# Altium PCB SkayboardRev4.PcbDoc (part 1 of 2)
Units mil, origin at the board's own origin, x right, y up, seen from the top; angles counter-clockwise.
Board outline 13972.57 x 4222.54 mil, 2 copper layers (Top Layer, Bottom Layer); 143 components, 152 nets, 1430 pads, 166 vias.
Unrouted connection lines stored in the file: 1.
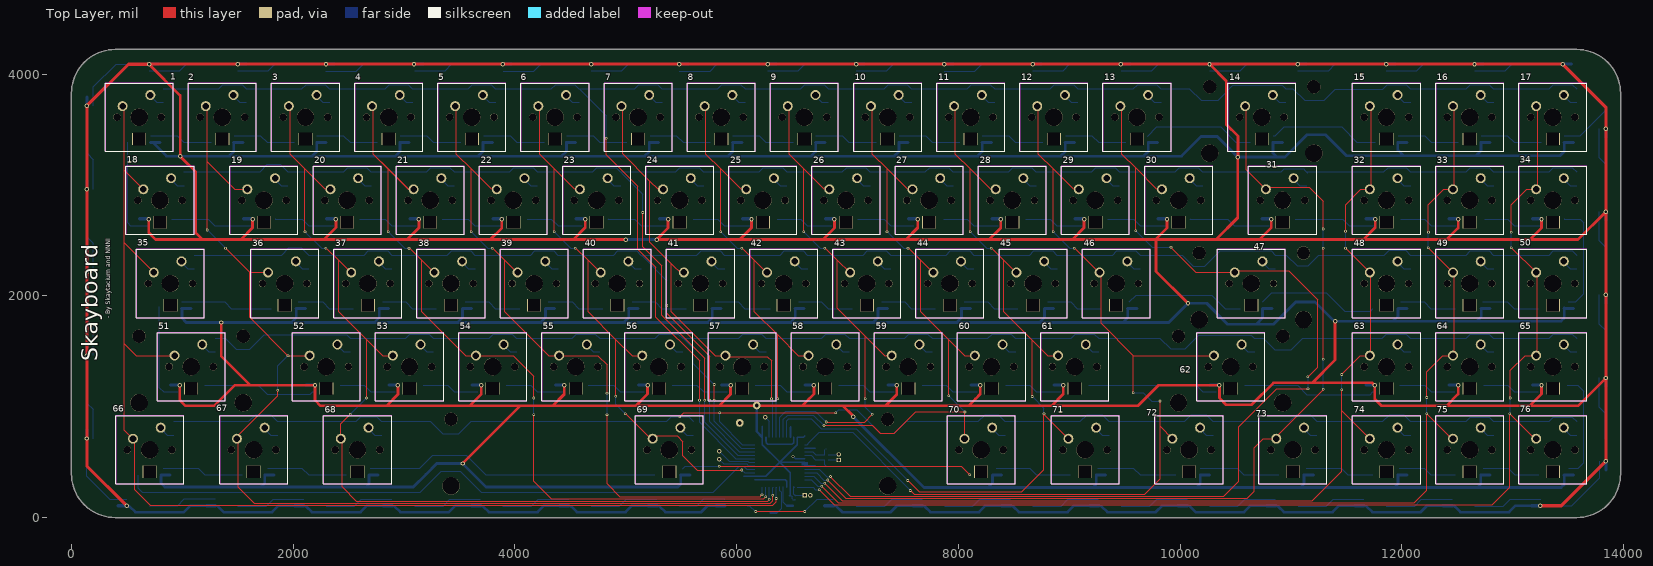
[diagram p0: Top Layer view]
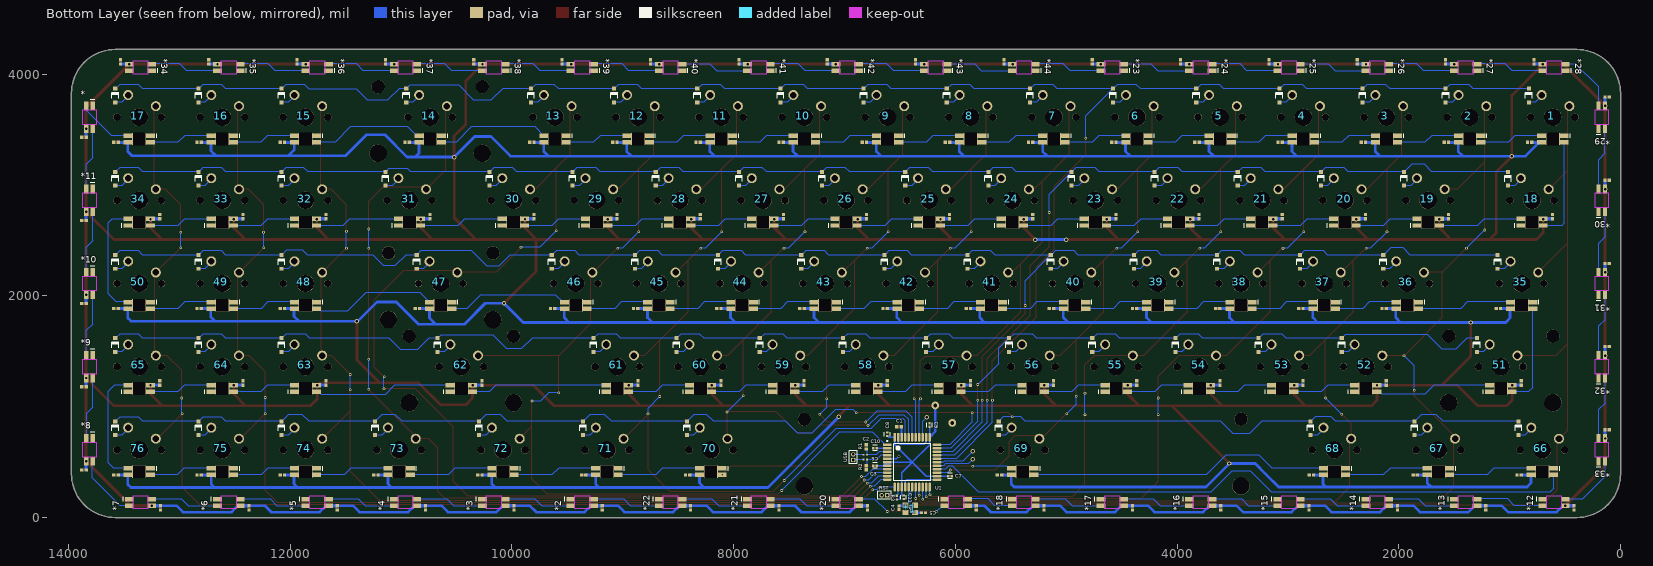
[diagram p1: Bottom Layer view, seen from below]

## Layer stack, top to bottom
Top Solder: solder mask 0.4, Solder Resist, Dk 3.5
Top Layer: signal copper 1.4
Dielectric 1: dielectric 12.6, FR-4, Dk 4.8
Bottom Layer: signal copper 1.4
Bottom Solder: solder mask 0.4, Solder Resist, Dk 3.5

## Board outline
58.09,188.06 42.95,215.02 30.04,243.12 19.35,272.1 10.94,301.83 4.92,332.15 1.29,362.86 0.04,393.78 0.09,3828.78 1.29,3859.71 4.92,3890.42 10.94,3920.74 19.35,3950.47 30.04,3979.52 42.95,4007.55 58.09,4034.52 75.23,4060.23 94.38,4084.52 115.38,4107.2 138.06,4128.22 162.37,4147.36 188.08,4164.52 215.04,4179.64 243.09,4192.55 272.12,4203.26 301.85,4211.65 332.18,4217.67 362.89,4221.33 393.81,4222.55 13578.87,4222.51 13609.73,4221.33 13640.44,4217.67 13670.75,4211.65 13700.52,4203.26 13729.5,4192.55 13757.57,4179.64 13784.53,4164.52 13810.24,4147.36 13834.5,4128.22 13857.25,4107.2 13878.24,4084.52 13897.33,4060.23 13914.53,4034.52 13929.69,4007.55 13942.61,3979.52 13953.31,3950.47 13961.62,3920.74 13967.76,3890.42 13971.35,3859.71 13972.61,3828.78 13972.61,393.78 13971.35,362.86 13967.76,332.15 13961.62,301.83 13953.31,272.1 13942.61,243.12 13929.69,215.02 13914.53,188.06 13897.33,162.34 13878.24,138.09 13857.25,115.36 13834.5,94.36 13810.24,75.21 13784.53,58.06 13757.57,42.93 13729.5,30.02 13700.52,19.33 13670.75,10.92 13640.44,4.9 13609.73,1.26 13578.87,0.01 393.81,0.07 362.89,1.26 332.18,4.9 301.85,10.92 272.12,19.33 243.09,30.02 215.04,42.93 188.08,58.06 162.37,75.21 138.06,94.36 115.38,115.36 94.38,138.09 75.23,162.34

## Design rules (kind name [scope] priority, off if disabled: settings)
BoardOutlineClearance [All] p1: gap=10 ignorepadtopadclearanceinfootprint=FALSE except(-1: Arc-OutlineEdge; 0: Arc-SplitContinuation Track-SplitContinuation SMDPad-SplitContinuation THPad-SplitContinuation Via-SplitContinuation Fill-SplitContinuation Poly-SplitContinuation Region-SplitContinuation Text-SplitContinuation)
Clearance [All] p1: gap=10 ignorepadtopadclearanceinfootprint=FALSE except(0: Arc-Hole Track-Hole SMDPad-Hole THPad-Hole Via-Hole Fill-Hole Poly-Hole Region-Hole Text-Hole)
PolygonConnect [All] p1: connectstyle=Relief reliefconductorwidth=10 reliefentries=4 polygonreliefangle="90 Angle" airgapwidth=10
RoutingVias [All] p1: holewidth=28 width=50 viastyle="Through Hole" minholewidth=28 minwidth=50 maxholewidth=28 maxwidth=50
SolderMaskExpansion [All] p1: expansion=4 istentingtop=FALSE
Width [All] p1: maxlimit=100 minlimit=5 preferedwidth=7.5 minimp=50.000000 maximp=50.000000 favimp=50.000000
30 further rules are at their usual default settings.

## Components (designator, comment, footprint, x,y, rotation, side; value= is the part's Value field where it differs from the comment)
1 "Skey LM" "MX RGB LM"#1 611.29,3611.31 r0 top
2 "Skey LM" "MX RGB LM"#1 1361.31,3611.29 r0 top
3 "Skey LM" "MX RGB LM"#1 2111.31,3611.29 r0 top
4 "Skey LM" "MX RGB LM"#1 2861.31,3611.29 r0 top locked
5 "Skey LM" "MX RGB LM"#1 3611.31,3611.29 r0 top
6 "Skey LM" "MX RGB LM"#1 4361.25,3611.29 r0 top
7 "Skey LM" "MX RGB LM"#1 5111.29,3611.32 r0 top
8 "Skey LM" "MX RGB LM"#1 5861.33,3611.29 r0 top
9 "Skey LM" "MX RGB LM"#1 6611.33,3611.29 r0 top
10 "Skey LM" "MX RGB LM"#1 7361.33,3611.29 r0 top
11 "Skey LM" "MX RGB LM"#1 8111.33,3611.29 r0 top
12 "Skey LM" "MX RGB LM"#1 8861.33,3611.29 r0 top
13 "Skey LM" "MX RGB LM"#1 9611.33,3611.29 r0 top
14 "Skey LM" "MX RGB LM"#1 10736.33,3611.29 r0 top
15 "Skey LM" "MX RGB LM"#1 11861.33,3611.29 r0 top
16 "Skey LM" "MX RGB LM"#1 12611.3,3611.31 r0 top
17 "Skey LM" "MX RGB LM"#2 13361.33,3611.29 r0 top
18 "Skey" "MX RGB"#1 798.78,2861.26 r0 top
19 "Skey" "MX RGB"#1 1736.31,2861.29 r0 top
20 "Skey" "MX RGB"#1 2486.31,2861.29 r0 top
21 "Skey" "MX RGB"#1 3236.31,2861.29 r0 top
22 "Skey" "MX RGB"#1 3986.32,2861.29 r0 top
23 "Skey" "MX RGB"#1 4736.33,2861.29 r0 top
24 "Skey" "MX RGB"#1 5486.33,2861.29 r0 top
25 "Skey" "MX RGB"#1 6236.33,2861.29 r0 top
26 "Skey" "MX RGB"#1 6986.33,2861.29 r0 top
27 "Skey" "MX RGB"#1 7736.33,2861.29 r0 top
28 "Skey" "MX RGB"#1 8486.33,2861.29 r0 top
29 "Skey" "MX RGB"#1 9236.33,2861.29 r0 top
30 "Skey" "MX RGB"#1 9986.33,2861.29 r0 top
31 "Skey" "MX RGB"#1 10923.79,2861.27 r0 top
32 "Skey" "MX RGB"#1 11861.33,2861.29 r0 top
33 "Skey" "MX RGB"#1 12611.33,2861.29 r0 top
34 "Skey" "MX RGB"#1 13361.33,2861.28 r0 top
35 "Skey LM" "MX RGB LM"#1 892.53,2111.25 r0 top
36 "Skey LM" "MX RGB LM"#1 1923.79,2111.26 r0 top
37 "Skey LM" "MX RGB LM"#1 2673.79,2111.26 r0 top
38 "Skey LM" "MX RGB LM"#1 3423.79,2111.26 r0 top
39 "Skey LM" "MX RGB LM"#1 4173.79,2111.26 r0 top
40 "Skey LM" "MX RGB LM"#1 4923.79,2111.27 r0 top
41 "Skey LM" "MX RGB LM"#1 5673.79,2111.27 r0 top
42 "Skey LM" "MX RGB LM"#1 6423.79,2111.27 r0 top
43 "Skey LM" "MX RGB LM"#1 7173.79,2111.27 r0 top
44 "Skey LM" "MX RGB LM"#1 7923.79,2111.27 r0 top
45 "Skey LM" "MX RGB LM"#1 8673.79,2111.27 r0 top
46 "Skey LM" "MX RGB LM"#1 9423.79,2111.27 r0 top
47 "Skey LM" "MX RGB LM"#1 10642.53,2111.27 r0 top
48 "Skey LM" "MX RGB LM"#1 11861.33,2111.29 r0 top
49 "Skey LM" "MX RGB LM"#1 12611.33,2111.29 r0 top
50 "Skey LM" "MX RGB LM"#1 13361.33,2111.28 r0 top
51 "Skey" "MX RGB"#1 1080.03,1361.26 r0 top
52 "Skey" "MX RGB"#1 2298.79,1361.26 r0 top
53 "Skey" "MX RGB"#1 3048.79,1361.26 r0 top
54 "Skey" "MX RGB"#1 3798.79,1361.27 r0 top
55 "Skey" "MX RGB"#1 4548.79,1361.27 r0 top
56 "Skey" "MX RGB"#1 5298.79,1361.27 r0 top
57 "Skey" "MX RGB"#2 6048.79,1361.27 r0 top
58 "Skey" "MX RGB"#1 6798.79,1361.27 r0 top
59 "Skey" "MX RGB"#1 7548.79,1361.27 r0 top
60 "Skey" "MX RGB"#1 8298.79,1361.27 r0 top
61 "Skey" "MX RGB"#1 9048.79,1361.27 r0 top
62 "Skey" "MX RGB"#1 10455.05,1361.27 r0 top
63 "Skey" "MX RGB"#1 11861.33,1361.29 r0 top
64 "Skey" "MX RGB"#1 12611.33,1361.29 r0 top
65 "Skey" "MX RGB"#1 13361.33,1361.29 r0 top
66 "Skey LM" "MX RGB LM"#1 705.03,611.26 r0 top
67 "Skey LM" "MX RGB LM"#1 1642.54,611.26 r0 top
68 "Skey LM" "MX RGB LM"#1 2580.04,611.26 r0 top
69 "Skey LM" "MX RGB LM"#1 5392.53,611.27 r0 top
70 "Skey LM" "MX RGB LM"#1 8205.05,611.27 r0 top
71 "Skey LM" "MX RGB LM"#1 9142.53,611.27 r0 top
72 "Skey LM" "MX RGB LM"#1 10080.05,611.27 r0 top
73 "Skey LM" "MX RGB LM"#1 11017.53,611.27 r0 top
74 "Skey LM" "MX RGB LM"#1 11861.33,611.29 r0 top
75 "Skey LM" "MX RGB LM"#1 12611.33,611.29 r0 top
76 "Skey LM" "MX RGB LM"#1 13361.33,611.29 r0 top
* "SK6812 Mini-E" "SK6812 Mini-E"#1 13810,3611.28 r90 bottom
*1 "16Mhz" 16Mhz 6405.51,78.74 r0 top
*2 "SK6812 Mini-E" "SK6812 Mini-E"#1 9365.62,138 r0 bottom
*3 "SK6812 Mini-E" "SK6812 Mini-E"#1 10162.5,138 r0 bottom
*4 "SK6812 Mini-E" "SK6812 Mini-E"#1 10959.38,138 r0 bottom
*5 "SK6812 Mini-E" "SK6812 Mini-E"#1 11756.25,138 r0 bottom
*6 "SK6812 Mini-E" "SK6812 Mini-E"#1 12553.12,138 r0 bottom
*7 "SK6812 Mini-E" "SK6812 Mini-E"#1 13350,138 r0 bottom
*8 "SK6812 Mini-E" "SK6812 Mini-E"#1 13810,611.29 r90 bottom
*9 "SK6812 Mini-E" "SK6812 Mini-E"#1 13810,1361.29 r90 bottom
*10 "SK6812 Mini-E" "SK6812 Mini-E"#1 13810,2111.28 r90 bottom
*11 "SK6812 Mini-E" "SK6812 Mini-E"#1 13810,2861.28 r90 bottom
*12 "SK6812 Mini-E" "SK6812 Mini-E"#1 600,138 r0 bottom
*13 "SK6812 Mini-E" "SK6812 Mini-E"#1 1396.88,138 r0 bottom
*14 "SK6812 Mini-E" "SK6812 Mini-E"#1 2193.75,138 r0 bottom
*15 "SK6812 Mini-E" "SK6812 Mini-E"#1 2990.62,138 r0 bottom
*16 "SK6812 Mini-E" "SK6812 Mini-E"#1 3787.5,138 r0 bottom
*17 "SK6812 Mini-E" "SK6812 Mini-E"#1 4584.38,138 r0 bottom
*18 "SK6812 Mini-E" "SK6812 Mini-E"#1 5381.25,138 r0 bottom
*19 "SK6812 Mini-E" "SK6812 Mini-E"#1 5992.12,138 r0 bottom
*20 "SK6812 Mini-E" "SK6812 Mini-E"#1 6975,138 r0 bottom
*21 "SK6812 Mini-E" "SK6812 Mini-E"#1 7771.88,138 r0 bottom
*22 "SK6812 Mini-E" "SK6812 Mini-E"#1 8568.75,138 r0 bottom
*23 "SK6812 Mini-E" "SK6812 Mini-E"#1 4584.38,4060 r180 bottom
*24 "SK6812 Mini-E" "SK6812 Mini-E"#1 3787.5,4060 r180 bottom
*25 "SK6812 Mini-E" "SK6812 Mini-E"#2 2990.62,4060 r180 bottom
*26 "SK6812 Mini-E" "SK6812 Mini-E"#1 2193.75,4060 r180 bottom
*27 "SK6812 Mini-E" "SK6812 Mini-E"#1 1396.88,4060 r180 bottom
*28 "SK6812 Mini-E" "SK6812 Mini-E"#1 600,4060 r180 bottom
*29 "SK6812 Mini-E" "SK6812 Mini-E"#1 170,3611.31 r270 bottom
*30 "SK6812 Mini-E" "SK6812 Mini-E"#2 170,2861.26 r270 bottom
*31 "SK6812 Mini-E" "SK6812 Mini-E"#1 170,2111.25 r270 bottom
*32 "SK6812 Mini-E" "SK6812 Mini-E"#2 170,1361.26 r270 bottom
*33 "SK6812 Mini-E" "SK6812 Mini-E"#1 170,611.26 r270 bottom
*34 "SK6812 Mini-E" "SK6812 Mini-E"#1 13350,4060 r180 bottom
*35 "SK6812 Mini-E" "SK6812 Mini-E"#1 12553.12,4060 r180 bottom
*36 "SK6812 Mini-E" "SK6812 Mini-E"#1 11756.25,4060 r180 bottom
*37 "SK6812 Mini-E" "SK6812 Mini-E"#1 10959.38,4060 r180 bottom
*38 "SK6812 Mini-E" "SK6812 Mini-E"#1 10162.5,4060 r180 bottom
*39 "SK6812 Mini-E" "SK6812 Mini-E"#2 9365.62,4060 r180 bottom
*40 "SK6812 Mini-E" "SK6812 Mini-E"#1 8568.75,4060 r180 bottom
*41 "SK6812 Mini-E" "SK6812 Mini-E"#2 7771.88,4060 r180 bottom
*42 "SK6812 Mini-E" "SK6812 Mini-E"#1 6975,4060 r180 bottom
*43 "SK6812 Mini-E" "SK6812 Mini-E"#1 6178.12,4060 r180 bottom
*44 "SK6812 Mini-E" "SK6812 Mini-E"#1 5381.25,4060 r180 bottom
C1 "100nF" CAPC1050X55X23ML05T13 6507.87,818.9 r180 bottom
C2 "47pF" CAPC1005X55X30ML05T10 6803.15,637.8 r90 bottom
C3 "47pF" CAPC1005X55X30ML05T10 6803.15,449.61 r90 bottom
C4 "22pF" CAPC1005X56X25NL10T15 6509.25,88.88 r90 bottom
C5 "22pF" CAPC1005X56X25NL10T15 6287.4,43.31 r0 bottom
C6 "100nF" FP-C0402-BB-MFG 6724.41,468.5 r0 bottom value="0.10 μF"
C7 "100nF" FP-C0402-BB-MFG 6047.24,374.02 r180 bottom value="0.10 μF"
C8 "100nF" FP-C0402-BB-MFG 6614.17,751.97 r90 bottom value="0.10 μF"
C9 "100nF" FP-C0402-BB-MFG 6232.28,834.65 r90 bottom value="0.10 μF"
C10 "100nF" FP-C0402-BB-MFG 6724.41,625.98 r0 bottom value="0.10 μF"
C11 "100nF" FP-C0402-BB-MFG 6465.89,183.31 r270 bottom value="0.10 μF"
R1 "22R" RESC1005X40X25LL05T05 6811.02,566.93 r0 bottom
R2 "22R" RESC1005X40X25LL05T05 6811.02,523.62 r0 bottom
R3 "10K" RESC1005X40X25NL05T05 6527.56,181.1 r90 bottom
RST "MHDR1X2" MHDR1X2 6615.35,200.79 r0 bottom
U1 "ATmega32U4-AU" 44ML_M 6389.76,500 r180 bottom locked
USB "MHDR1X2" MHDR1X2 6921.26,519.68 r90 bottom
? "Comment" 2UStab 10736.33,3611.29 r0 top
? "Comment" 2UStab 10642.53,2111.27 r0 top
? "Comment" 2UStab 10455.05,1361.27 r0 top
? "Comment" 6.25UStab 5392.53,611.27 r0 top locked
? "Comment" 2UStab 1080.03,1361.26 r0 top

## Footprints (in the part's own frame and the unit in brackets; to place one, negate y for a bottom-side part, rotate by r counter-clockwise, add the part's x,y. Pads: shape width x height; smd on the part's side, far side on the other; paste and mask are expansions set on the pad)
2UStab [mil]
  round 157 hole 157: ""(-470,-325) ""(470,-325)
  round 120 hole 120: ""(-470,275) ""(470,275)
6.25UStab [mil]
  round 157 hole 157: ""(-1968.75,-325) ""(1968.75,-325)
  round 120 hole 120: ""(-1968.75,275) ""(1968.75,275)
16Mhz [mm]
  rect 1.4x1.2 smd far side: 1(-1.1,-0.85) 2(1.1,-0.85) 3(1.1,0.85) 4(-1.1,0.85)
44ML_M [mm] "Thin QFP, 44-Leads, Body 10x10mm, Pitch 0.8mm, IPC Low Density"
  oval 2.05x0.6 smd: 1(-5.7,4) 2(-5.7,3.2) 3(-5.7,2.4) 4(-5.7,1.6) 5(-5.7,0.8) 6(-5.7,0) 7(-5.7,-0.8) 8(-5.7,-1.6) 9(-5.7,-2.4) 10(-5.7,-3.2) 11(-5.7,-4) 23(5.7,-4) 24(5.7,-3.2) 25(5.7,-2.4) 26(5.7,-1.6) 27(5.7,-0.8) 28(5.7,0) 29(5.7,0.8) 30(5.7,1.6) 31(5.7,2.4) 32(5.7,3.2) 33(5.7,4)
  oval 0.6x2.05 smd: 12(-4,-5.7) 13(-3.2,-5.7) 14(-2.4,-5.7) 15(-1.6,-5.7) 16(-0.8,-5.7) 17(0,-5.7) 18(0.8,-5.7) 19(1.6,-5.7) 20(2.4,-5.7) 21(3.2,-5.7) 22(4,-5.7) 34(4,5.7) 35(3.2,5.7) 36(2.4,5.7) 37(1.6,5.7) 38(0.8,5.7) 39(0,5.7) 40(-0.8,5.7) 41(-1.6,5.7) 42(-2.4,5.7) 43(-3.2,5.7) 44(-4,5.7)
  silkscreen extent -5.82,-4.25 4.25,4.97, body extent -5,-5 5,5, height 1.2
CAPC1005X55X30ML05T10 [mm] "Chip Capacitor, 2-Leads, Body 1.00x0.50mm, IPC Low Density"
  rect 0.76x0.72 smd: 1(-0.48,0) 2(0.48,0)
  body extent -0.53,-0.28 0.53,0.27, height 0.55
CAPC1005X56X25NL10T15 [mm] "Chip Capacitor, 2-Leads, Body 1.00x0.50mm, IPC Medium Density"
  rect 0.68x0.64 smd: 1(-0.44,0) 2(0.44,0)
  body extent -0.55,-0.3 0.55,0.3, height 0.56
CAPC1050X55X23ML05T13 [mm] "Chip Capacitor, 2-Leads, Body 1.05x0.55mm, IPC Low Density"
  rect 0.76x0.72 smd: 1(-0.49,0) 2(0.49,0)
  body extent -0.53,-0.28 0.53,0.27, height 0.55
FP-C0402-BB-MFG [mm]
  rect 0.52x0.52 smd paste+0 mask+0: 1(-0.4,0) 2(0.4,0)
  silkscreen extent -0.5,-0.64 0.5,0.64, body extent -0.5,-0.25 0.5,0.25, height 0.55
MHDR1X2 [mm] "Connector; Header; 2 Position"
  rect 1x1 hole 0.6: 1(0,0)
  round 1 hole 0.6: 2(1.27,0)
  silkscreen extent -0.9,-0.9 2.17,0.9
"MX RGB"#1 [mm] "Skey's footprint"
  rect 2x1 smd far side: 1(-2.6,-4.25) 2(-2.6,-5.75) 3(2.6,-5.75) 4(2.6,-4.25)
  rect 0.72x0.76 smd far side: 3(-4.699,-3.248) ""(-4.699,-4.228)
  round 2.286 hole 1.499: 5(-3.81,2.54) ""(2.54,5.08)
  rect 0.95x0.9 smd far side: 6(5.488,6.534) ""(5.488,3.384)
  round 1.702 hole 1.702: ""(-5.08,0) ""(5.08,0)
  rect 3.2x2.8 hole 2.8 square: ""(0,-5)
  round 3.988 hole 3.988: ""(0,0)
  Top Layer keep-out region: -7.8,-7.8 7.8,-7.8 7.8,7.8 -7.8,7.8
  Bottom Layer lines w0.127: 2.529,4.846 3.991,3.384 5.507,3.384
  Bottom Layer lines w0.254: 2.521,4.829 2.521,5.132 ; 2.529,4.846 2.529,5.12
  Bottom Layer lines w0.737: -4.659,-4.227 -2.6,-4.227 -2.589,-4.227 -2.551,-4.227
  silkscreen extent -7.8,-7.8 7.8,7.8
"MX RGB"#2 [mm] "Skey's footprint"
  rect 2x1 smd far side: 1(-2.6,-4.25) 2(-2.6,-5.75) 3(2.6,-5.75) 4(2.6,-4.25)
  rect 0.72x0.76 smd far side: 3(-4.699,-3.248) ""(-4.699,-4.228)
  round 2.286 hole 1.499: 5(-3.81,2.54) ""(2.54,5.08)
  rect 0.95x0.9 smd far side: 6(5.488,6.534) ""(5.488,3.384)
  round 1.702 hole 1.702: ""(-5.08,0) ""(5.08,0)
  rect 3.2x2.8 hole 2.8 square: ""(0,-5)
  round 3.988 hole 3.988: ""(0,0)
  Top Layer keep-out region: -7.8,-7.8 7.8,-7.8 7.8,7.8 -7.8,7.8
  Bottom Layer lines w0.127: 2.529,4.846 3.991,3.384 5.507,3.384
  Bottom Layer lines w0.254: 2.521,4.829 2.521,5.132 ; 2.529,4.846 2.529,5.12
  Bottom Layer lines w0.737: -4.659,-4.227 -2.551,-4.227
  silkscreen extent -7.8,-7.8 7.8,7.8
"MX RGB LM"#1 [mm] "Skey's footprint"
  rect 2x1 smd far side: 1(-2.6,-4.25) 2(-2.6,-5.75) 3(2.6,-5.75) 4(2.6,-4.25)
  rect 0.76x0.72 smd far side: 1(5.805,-5.75) ""(4.825,-5.75)
  round 2.286 hole 1.499: 5(-3.81,2.54) ""(2.54,5.08)
  rect 0.95x0.9 smd far side: 6(5.488,6.534) ""(5.488,3.384)
  round 1.702 hole 1.702: ""(-5.08,0) ""(5.08,0)
  rect 3.2x2.8 hole 2.8 square: ""(0,-5)
  round 3.988 hole 3.988: ""(0,0)
  Top Layer keep-out region: -7.8,-7.8 7.8,-7.8 7.8,7.8 -7.8,7.8
  Bottom Layer lines w0.127: 2.529,4.846 3.991,3.384 5.507,3.384
  Bottom Layer lines w0.254: 2.521,4.829 2.521,5.132 ; 2.529,4.846 2.529,5.12
  Bottom Layer lines w0.7: 2.592,-5.754 4.7,-5.754
  silkscreen extent -7.8,-7.8 7.8,7.8
"MX RGB LM"#2 [mm] "Skey's footprint"
  rect 2x1 smd far side: 1(-2.6,-4.25) 2(-2.6,-5.75) 3(2.6,-5.75) 4(2.6,-4.25)
  rect 0.76x0.72 smd far side: 1(5.805,-5.75) ""(4.825,-5.75)
  round 2.286 hole 1.499: 5(-3.81,2.54) ""(2.54,5.08)
  rect 0.95x0.9 smd far side: 6(5.488,6.534) ""(5.488,3.384)
  round 1.702 hole 1.702: ""(-5.08,0) ""(5.08,0)
  rect 3.2x2.8 hole 2.8 square: ""(0,-5)
  round 3.988 hole 3.988: ""(0,0)
  Top Layer keep-out region: -7.8,-7.8 7.8,-7.8 7.8,7.8 -7.8,7.8
  Bottom Layer lines w0.127: 2.529,4.846 3.991,3.384 5.507,3.384
  Bottom Layer lines w0.254: 2.521,4.829 2.521,5.132 ; 2.529,4.846 2.529,5.12
  Bottom Layer lines w0.7: 2.592,-5.754 2.6,-5.754 2.622,-5.754 4.7,-5.754
  silkscreen extent -7.8,-7.8 7.8,7.8
RESC1005X40X25LL05T05 [mm] "Chip Resistor, 2-Leads, Body 1.00x0.50mm, IPC High Density"
  rect 0.45x0.45 smd: 1(-0.4,0) 2(0.4,0)
  body extent -0.53,-0.27 0.53,0.28, height 0.4
RESC1005X40X25NL05T05 [mm] "Chip Resistor, 2-Leads, Body 1.00x0.50mm, IPC Medium Density"
  rect 0.55x0.55 smd: 1(-0.45,0) 2(0.45,0)
  body extent -0.53,-0.27 0.53,0.28, height 0.4
"SK6812 Mini-E"#1 [mm]
  rect 2x1 smd: 1(-2.6,0.769) 2(-2.6,-0.731) 3(2.6,-0.731) 4(2.6,0.769)
  rect 0.72x0.76 smd: 3(-4.598,1.756) ""(-4.598,0.776)
  Top Layer lines w0.737: -4.558,0.777 -2.6,0.777 -2.449,0.777
  Top Layer keep-out region: -1.7,1.5 1.7,1.5 1.7,-1.5 -1.7,-1.5
  silkscreen extent 3.98,-1.23 3.98,-0.23
"SK6812 Mini-E"#2 [mm]
  rect 2x1 smd: 1(-2.6,0.769) 2(-2.6,-0.731) 3(2.6,-0.731) 4(2.6,0.769)
  rect 0.72x0.76 smd: 3(-4.598,1.756) ""(-4.598,0.776)
  Top Layer lines w0.737: -2.449,0.777 -2.525,0.777 -2.6,0.777 -4.558,0.777
  Top Layer keep-out region: -1.7,1.5 1.7,1.5 1.7,-1.5 -1.7,-1.5
  silkscreen extent 3.98,-1.23 3.98,-0.23

## Part data
1 2 3 4 5 6 7 8 9 10 11 12 13 14 15 16 17 35 36 37 38 39 40 41 42 43 44 45 46 47 48 49 50 66 67 68 69 70 71 72 73 74 75 76: "Skey but the LED is mirrored"
18 19 20 21 22 23 24 25 26 27 28 29 30 31 32 33 34 51 52 53 54 55 56 57 58 59 60 61 62 63 64 65: "Skaytacium's keyboard's key's symbol"
*1: "LCSC didn't have the footprint"
C1: library part CMP-2000-05439-1, "Chip Capacitor, 100 nF, +/- 10%, 16 V, -55 to 125 degC, 0402 (1005 Metric), RoHS, Tape and Reel", Capacitance=100000pF, Case Size/Dimension=0402, Dielectric=X7R, Manufacturer="Samsung Electro-Mechanics", Rated Voltage=16V, Tolerance (%)=±10%, Datasheet URL=https://datasheet.ciiva.com/29198/458718-da-01-en-vs-kondensator-0402-29198423.pdf, Datasheet Version=Nov-10, Manufacturer URL=http://www.samsungsem.com/global/index.jsp
C2 C3: library part CMP-2008-03283-1, Manufacturer=Kemet, Part Number=C0402C470J5GACTU
C4 C5: library part CMP-2008-02613-1, Manufacturer="AVX Interconnect / Elco", Part Number=04025A220JAT2A
C6 C7 C8 C9 C10 C11: library part CMP-03020-023811-1, "CAP CER 0.1UF 10V X5R 0402", Capacitance="0.10 μF", Manufacturer=Kemet, Manufacturer Part Number=C0402C104K8PACTU, Package=C0402-BB, Temperature="-55°C to +125°C", Temperature Characteristic=X5R, Temperature Coefficient=15%, Temperature Range High=+125°C, Temperature Range Low=-55°C, Tolerance=0.1, Voltage Rating="10 V", Automotive=No, Category=Cap, ComponentLink2Description=Datasheet, ComponentLink2URL=https://content.kemet.com/datasheets/KEM_C1002_X7R_SMD.pdf, Device Class L1="Passive Components", Device Class L2=Capacitors, Device Class L3="Ceramic Capacitors", Digikey Description="CAP CER 0.1UF 10V X5R 0402", Height=0.55mm, Ipc Land Pattern Name=CAPC10050X50, Lead Free=Yes, Material=Ceramic, Mouser Description="Capacitor 100 nF 10 VDC 0402", Octopart=https://octopart.com/c0402c104k8pactu-kemet-140039, RoHS=TRUE
R1 R2: library part CMP-2002-08382-1, Manufacturer="Vishay Dale", Part Number=CRCW040222R0FKED
R3: library part CMP-2002-01183-1, Manufacturer=Panasonic, Part Number=ERT-J0ER103J
RST USB: "Header, 2-Pin", LatestRevisionDate=17-Jul-2002, LatestRevisionNote="Re-released for DXP Platform.", Publisher="Altium Limited"
U1: library part CMP-0095-00285-2, "8-bit AVR Microcontroller, 2.7-5.5V, 16MHz, 32KB Flash, 1KB EEPROM, 2.5KB SRAM, USB Controller, 44-pin TQFP, Industrial Grade (-40°C to 85°C), Ext Osc", ComponentLink1Description="Manufacturer URL", ComponentLink1URL=http://www.atmel.com/, ComponentLink2Description="ATmega16U4/32U4 Datasheet", ComponentLink2URL=http://www.atmel.com/dyn/resources/prod_documents/doc7766.pdf, ComponentLink3Description="ATmega16U4 ATmega32U4 Summary", ComponentLink3URL=http://www.atmel.com/dyn/resources/prod_documents/7766S.pdf, DatasheetVersion="revF, Nov-2010", PackageDescription="44-Pin Plastic Thin Quad Flat Pack, 10 x 10 x 1.0 mm Body, 0.8 mm Pitch (TQFP)", PackageReference=44ML, PackageVersion="rev.G, Jul-2007", RevisionNote="DatasheetVersion updated. URLs added."

## Free pads (board coordinates)
  round 70 hole 35: ""(6027.56,854.33) ""(6181.1,1011.81)

## Via types
v1: diameter 24, hole 12, Top Layer to Bottom Layer, 92 vias
v2: diameter 40, hole 22, Top Layer to Bottom Layer, 73 vias
v3: diameter 30, hole 15, Top Layer to Bottom Layer, 1 vias

## Nets (pads, with @x,y where several pads share a name; then routed paths per layer and width w, separated by ;. In a path a pad name is that pad's centre, name@x,y a point inside that pad or via, vN(x,y) a via of type N, cw(c..) or ccw(c..) an arc to the next point about the centre after c; other vN are vias at no path point)
GND: 1.1 2.1 3.1 4.1 5.1 6.1 7.1 8.1 9.1 10.1 11.1 12.1 13.1 14.1 15.1 16.1 17.1 18.3 19.3 20.3 21.3 22.3 23.3 24.3 25.3 26.3 27.3 28.3 29.3 30.3 31.3 32.3 33.3 34.3 35.1 36.1 37.1 38.1 39.1 40.1 41.1 42.1 43.1 44.1 45.1 46.1 47.1 48.1 49.1 50.1 51.3 52.3 53.3 54.3 55.3 56.3 57.3 58.3 59.3 60.3 61.3 62.3 63.3 64.3 65.3 66.1 67.1 68.1 69.1 70.1 71.1 72.1 73.1 74.1 75.1 76.1 *2.3 *3.3 *4.3 *5.3 *6.3 *7.3 *8.3 *9.3 *10.3 *11.3 *12.3 *13.3 *14.3 *15.3 *16.3 *17.3 *18.3 *19.3 *20.3 *21.3 *22.3 *23.3 *24.3 *25.3 *26.3 *27.3 *28.3 *29.3 *30.3 *31.3 *32.3 *33.3 *34.3 *35.3 *36.3 *37.3 *38.3 *39.3 *40.3 *41.3 *42.3 *43.3 *44.3 *.3 C1.1 C2.2 C3.1 C4.1 C5.1 C6.2 C7.2 C8.2 C9.2 C10.2 C11.2 pad.@6027.56,854.33 RST.2 U1.5 U1.15 U1.23 U1.35 U1.43 | length 818.5
  Bottom Layer w15: U1.23@6165.35,342.52 6437.01,342.52 6452.76,326.77 U1.15@6452.76,275.59 ; U1.35@6263.78,724.41 6265.43,722.76 6265.43,688.12 6265.96,687.58 6265.96,675.89 6280.44,661.42 6500,661.42 6514.1,675.52 6514.1,722.76 U1.43@6515.75,724.41 ; v3(6507.87,551.18) 6511.81,551.18 6531.5,531.5 U1.5@6614.17,531.5
Net1_2: 1.2 18.2 | length 926.1
  Bottom Layer w5: 1.2@507.87,3386.56 507.87,2657.48 531.5,2633.86 18.2@695.08,2633.86
Net1_4: 1.4 2.2 | length 570.5
  Bottom Layer w5: 1.4@713.63,3443.99 714.53,3444.88 952.76,3444.88 1012.73,3384.91 2.2@1258.94,3384.91
Net1_5: 1.5 18.5 35.5 51.5 66.5 U1.18 | length 10609.6
  Top Layer w5: 1.5@476.38,3696.22 476.38,3133.66 ; 18.5@648.78,2961.26 476.38,3133.66 ; 35.5@742.53,2211.25 476.38,2477.41 ; 51.5@929.61,1460.84 582.47,1460.84 476.38,1566.93 ; v1@6358.27,165.35 6358.27,141.73 6326.77,110.24 712.6,110.24 570.87,251.97 570.87,695.43 66.5@555.03,711.26 476.38,789.92 476.38,1566.93 ; 476.38,1566.93 476.38,2477.41 ; 476.38,2477.41 476.38,3133.66
  Top Layer w10: 1.5@461.29,3711.31 1.5@476.38,3696.22 ; 51.5@929.61,1460.84 51.5@930.03,1461.26
  Bottom Layer w5: v1(6358.05,172.44) 6358.05,273.4 U1.18@6358.27,273.62 ; U1.18@6358.27,275.59 U1.18@6360.24,273.62
Net1_6: 1.6 2.6 3.6 4.6 5.6 6.6 7.6 8.6 9.6 10.6 11.6 12.6 13.6 14.6 15.6 16.6 17.6 U1.29 | length 17490.6
  Top Layer w5: v1(4822.83,3421.26) 4822.83,3271.65 5106.3,2988.19 5106.3,2421.26 5271.65,2255.91 5271.65,1807.09 5665.35,1413.39 v1(5665.35,1059.06)
  Bottom Layer w5: 1.6@827.36,3868.56 1329.19,3868.56 1366.14,3905.51 1539.42,3905.51 1576.4,3868.53 2.6@1577.39,3868.53 2079.22,3868.53 2116.17,3905.49 2289.45,3905.49 2326.43,3868.51 2828.26,3868.51 2865.22,3905.46 3038.5,3905.46 3075.48,3868.48 3577.3,3868.48 3614.26,3905.44 3787.54,3905.44 5.6@3824.52,3868.46 ; 5.6@3827.39,3868.53 4329.22,3868.53 4366.17,3905.49 4539.45,3905.49 6.6@4576.43,3868.51 ; 6.6@4577.32,3868.53 6.6@4578.3,3868.53 ; v1(4822.83,3421.26) 4822.83,3623.02 4593.52,3852.33 4593.52,3853.31 6.6@4578.3,3868.53 ; v1(5665.35,1059.06) 5665.35,858.27 5992.13,531.5 U1.29@6165.35,531.5 ; 8.6@6075.41,3868.48 6038.43,3905.46 5865.15,3905.46 5828.19,3868.51 5326.36,3868.51 5289.38,3905.49 5116.1,3905.49 5079.15,3868.53 6.6@4578.3,3868.53 ; 8.6@6077.4,3868.53 6579.23,3868.53 6616.18,3905.49 6789.46,3905.49 9.6@6826.44,3868.51 ; 9.6@6827.4,3868.53 7329.23,3868.53 7366.18,3905.49 7539.46,3905.49 10.6@7576.44,3868.51 ; 10.6@7577.4,3868.53 8079.23,3868.53 8116.18,3905.49 8289.46,3905.49 8326.44,3868.51 8828.27,3868.51 8865.23,3905.46 9038.51,3905.46 12.6@9075.49,3868.48 ; 12.6@9077.4,3868.53 9579.23,3868.53 9616.18,3905.49 9789.46,3905.49 13.6@9826.44,3868.51 ; 13.6@9827.4,3868.53 10084.22,3868.53 10188.98,3763.78 10342.52,3763.78 10476.38,3897.64 10922.31,3897.64 10951.41,3868.53 14.6@10952.4,3868.53 11017.3,3868.53 11122.05,3763.78 11299.21,3763.78 11397.64,3862.2 11826.77,3862.2 11870.08,3905.51 12039.43,3905.51 12076.41,3868.53 15.6@12077.4,3868.53 12579.23,3868.53 12616.18,3905.49 12789.46,3905.49 12826.44,3868.51 13328.27,3868.51 13365.23,3905.46 13538.51,3905.46 17.6@13575.49,3868.48
Net2_4: 2.4 3.2 | length 569.3
  Bottom Layer w5: 2.4@1466.49,3444.88 1704.72,3444.88 1764.7,3384.91 3.2@2010.9,3384.91
Net2_5: 2.5 19.5 36.5 52.5 67.5 U1.19 | length 9783.2
  Top Layer w5: 2.5@1211.31,3711.29 1224.41,3698.19 1224.41,3208.66 ; v1(1224.41,2594.49) 1224.41,3208.66 ; v1(1389.76,2429.13) 1607.64,2211.26 ; 19.5@1586.31,2961.29 1471.79,2961.29 1224.41,3208.66 ; 36.5@1773.79,2211.26 1607.64,2211.26 ; v1(1862.2,1149.61) 1862.2,1098.43 1492.54,728.76 67.5@1492.54,711.26 1503.94,699.86 1503.94,275.59 1649.61,129.92 6303.14,129.92 6326.76,153.54 v1(6326.76,200.79) ; 52.5@2148.79,1461.26 2148.15,1460.63 v1(1952.76,1460.63) 1607.64,1805.75 1607.64,2211.26
  Bottom Layer w5: v1(1224.41,2594.49) v1(1389.76,2429.13) ; v1(1862.2,1149.61) 1862.2,1370.08 v1(1952.76,1460.63) ; v1(6326.76,200.79) 6326.76,267.7 6330.71,271.65 U1.19@6326.77,275.59
Net3_4: 3.4 4.2 | length 569.3
  Bottom Layer w5: 3.4@2214.53,3444.88 2452.76,3444.88 2512.73,3384.91 4.2@2758.94,3384.91
Net3_5: 3.5 20.5 37.5 53.5 68.5 U1.20 | length 8638.2
  Top Layer w5: 3.5@1961.31,3711.29 1972.44,3700.16 1972.44,3279.53 2106.3,3145.67 ; v1(2106.3,2578.74) 2106.3,3145.67 ; v1(2295.28,2429.13) 2300.42,2429.13 2409.36,2320.2 ; 20.5@2336.31,2961.29 2332.37,2965.23 2286.74,2965.23 2106.3,3145.67 ; v1(2515.75,933.07) 2430.04,847.36 68.5@2430.04,711.26 2440.94,700.36 2440.94,279.53 2570.87,149.61 6280.31,149.61 v1(6294.72,164.02) ; 37.5@2523.79,2211.26 2518.29,2211.26 2409.36,2320.2 ; v1(2661.42,1078.74) 2661.42,1606.3 ; 53.5@2898.79,1461.26 2806.46,1461.26 2661.42,1606.3 ; 2409.36,2320.2 2409.36,1858.36 2661.42,1606.3
  Bottom Layer w5: v1(2106.3,2578.74) 2255.91,2429.13 v1(2295.28,2429.13) ; v1(2515.75,933.07) v1(2661.42,1078.74) ; v1(6294.72,164.02) 6294.72,272.07 6294.83,272.18 6293.35,273.66 U1.20@6295.28,275.59
Net4_4: 4.4 5.2 | length 569.3
  Bottom Layer w5: 4.4@2966.49,3444.88 3204.72,3444.88 3264.7,3384.91 5.2@3510.9,3384.91
Net4_5: 4.5 21.5 38.5 54.5 U1.21 | length 8725.6
  Top Layer w5: 4.5@2711.26,3709.76 2722.39,3698.64 2722.39,3278.01 2856.25,3144.15 ; 4.5@2711.31,3711.29 2722.44,3700.16 2722.44,3279.53 2856.3,3145.67 ; v1(2856.25,2577.22) 2856.25,3144.15 ; v1(2856.3,2578.74) 2856.3,3144.1 ; v1@3050.42,2429.13 3159.36,2320.2 ; 21.5@3086.26,2959.76 3082.32,2963.7 3036.69,2963.7 2856.3,3144.1 ; 21.5@3086.31,2961.29 3082.37,2965.23 3036.74,2965.23 2856.3,3145.67 ; 38.5@3268.29,2211.26 3159.36,2320.2 ; 3556.41,1459.74 54.5@3648.74,1459.74 ; 3556.46,1461.26 3159.36,1858.36 3159.36,2320.2 ; 54.5@3648.79,1461.27 3983.62,1461.27 4145.67,1299.21 4169.29,1275.59 v1(4169.29,1078.74) ; v1(4169.29,929.13) 4169.29,326.02 4326.02,169.29 6244.73,169.29 v1(6263.53,188.09) ; 2856.25,3144.15 2856.3,3144.1 ; 2856.3,3144.1 2856.3,3145.67
  Bottom Layer w5: v1(2856.25,2577.22) 3005.86,2427.61 v1(3045.23,2427.61) ; v1(2856.3,2578.74) 3005.91,2429.13 v1(3045.28,2429.13) ; v1(4169.29,929.13) v1(4169.29,1078.74) ; v1(6263.53,188.09) 6263.53,274.47 6264.22,275.15 U1.21@6263.78,275.59
Net5_4: 5.4 6.2 | length 569.3
  Bottom Layer w5: 5.4@3718.46,3444.88 3956.69,3444.88 4016.67,3384.91 6.2@4262.87,3384.91
Net5_5: 5.5 22.5 39.5 55.5 U1.22 | length 6239
  Top Layer w5: 5.5@3461.31,3711.29 3472.44,3700.16 3472.44,3279.53 3606.3,3145.67 ; v1(3606.3,2578.74) 3606.3,3145.67 ; v1@3800.42,2429.13 3909.36,2320.2 ; 22.5@3836.32,2961.29 3832.37,2965.23 3786.74,2965.23 3606.3,3145.67 ; 39.5@4018.29,2211.26 3909.36,2320.2 ; 55.5@4398.79,1461.27 4306.46,1461.26 3909.36,1858.36 3909.36,2320.2 ; 55.5@4398.79,1461.27 4747.39,1461.27 4830.71,1377.95 v1(4830.71,1122.05) ; v1(4830.71,929.13) 4830.71,303.15 4944.88,188.98 6212.6,188.98 v1(6228.35,204.72)
  Bottom Layer w5: v1(3606.3,2578.74) 3755.91,2429.13 v1(3795.28,2429.13) ; v1(4830.71,929.13) v1(4830.71,1122.05) ; v1(6228.35,204.72) 6228.35,209.87 6232.28,213.8 U1.22@6232.28,275.59
Net6_4: 6.4 7.2 | length 569.3
  Bottom Layer w5: 6.4@4466.49,3444.88 4704.72,3444.88 4764.7,3384.91 7.2@5010.9,3384.91
Net6_5: 6.5 23.5 40.5 56.5 69.5 U1.25 | length 5356.2
  Top Layer w5: 6.5@4211.25,3711.29 4222.37,3700.16 4222.37,3279.53 4356.23,3145.67 ; v1(4356.23,2578.74) 4356.23,3145.67 ; v1@4550.35,2429.13 4659.29,2320.2 ; 23.5@4586.25,2961.29 4582.31,2965.23 4536.68,2965.23 4356.23,3145.67 ; 40.5@4768.23,2211.26 4659.29,2320.2 ; v1(4909.45,1094.49) 4909.45,1604.4 4911.35,1606.3 ; v1(4996.06,937.01) 5001.2,937.01 5226.94,711.27 69.5@5242.53,711.27 69.5@5262.73,711.27 ; 56.5@5148.72,1461.26 5056.39,1461.26 4911.35,1606.3 ; 69.5@5259.84,736.22 5464.57,736.22 5515.75,685.04 5515.75,559.06 5645.67,429.13 v1(6047.24,429.13) ; 4659.29,2320.2 4659.29,1858.36 4911.35,1606.3
  Bottom Layer w5: v1(4356.23,2578.74) 4505.84,2429.13 v1(4545.21,2429.13) ; v1(4909.45,1094.49) 4909.45,1023.62 v1(4996.06,937.01) ; v1(6047.24,429.13) 6070.87,405.51 U1.25@6165.35,405.51
Net7_4: 7.4 8.2 | length 569.3
  Bottom Layer w5: 7.4@5218.46,3444.88 5456.69,3444.88 5516.67,3384.91 8.2@5762.87,3384.91
Net7_5: 7.5 24.5 41.5 57.5 U1.37 | length 4153.8
  Top Layer w5: 7.5@4961.29,3711.32 4972.41,3700.2 4972.41,3279.57 5216.54,3035.44 ; 24.5@5336.33,2961.29 5332.35,2965.26 5286.72,2965.26 5216.54,3035.44 ; 41.5@5508.8,2226.26 41.5@5523.79,2211.27 ; 41.5@5515.75,2192.91 5507.87,2192.91 5409.33,2291.46 ; 57.5@5898.79,1461.27 5806.43,1461.3 5409.33,1858.4 5409.33,2291.46 ; 57.5@5898.79,1461.27 5923.05,1437.01 5930.05,1437.01 5945.32,1452.27 6276.08,1452.27 6314.96,1413.39 v1(6314.96,1070.87) ; 5216.54,3035.44 5216.54,2484.25 5409.33,2291.46
  Bottom Layer w5: v1(6314.96,1070.87) 6314.96,1066.91 6326.77,1055.1 U1.37@6326.77,724.41
Net8_4: 8.4 9.2 | length 569.3
  Bottom Layer w5: 8.4@5966.49,3444.88 6204.72,3444.88 6264.7,3384.91 9.2@6510.9,3384.91
Net8_5: 8.5 25.5 42.5 58.5 U1.38 | length 4101.9
  Top Layer w5: 8.5@5711.33,3711.29 5722.45,3700.16 5722.45,3279.53 5856.31,3145.67 ; v1(5856.31,2578.74) 5856.31,3145.67 ; v1@6050.43,2429.13 6159.37,2320.2 ; 25.5@6086.33,2961.29 6082.39,2965.23 6036.75,2965.23 5856.31,3145.67 ; 42.5@6268.31,2211.26 6159.37,2320.2 ; v1(6370.08,1070.87) 6370.08,1647.65 ; 58.5@6648.79,1461.27 6556.47,1461.26 6370.08,1647.65 ; 6159.37,2320.2 6159.37,1858.36 6370.08,1647.65
  Bottom Layer w5: v1(5856.31,2578.74) 6005.92,2429.13 v1(6045.29,2429.13) ; U1.38@6358.27,724.41 6358.27,1055.1 6370.08,1066.91 v1(6370.08,1070.87)
Net9_4: 9.4 10.2 | length 569.3
  Bottom Layer w5: 9.4@6714.53,3444.88 6952.76,3444.88 7012.73,3384.91 10.2@7258.95,3384.91
Net9_5: 9.5 26.5 43.5 59.5 U1.39 | length 4993.8
  Top Layer w5: 9.5@6461.33,3711.29 6472.45,3700.16 6472.45,3279.53 6606.31,3145.67 ; v1(6606.31,2578.74) 6606.31,3145.67 ; v1@6800.43,2429.13 6909.37,2320.2 ; v1(6807.09,862.2) 7153.54,862.2 v1(7224.41,933.07) ; 26.5@6836.33,2961.29 6832.39,2965.23 6786.75,2965.23 6606.31,3145.67 ; 43.5@7018.31,2211.26 6909.37,2320.2 ; v1(7161.42,1070.87) 7161.42,1635.12 ; 59.5@7398.79,1461.27 7335.28,1461.26 7161.42,1635.12 ; 6909.37,2320.2 6909.37,1887.17 7161.42,1635.12
  Bottom Layer w5: U1.39@6389.76,724.41 6389.76,905.51 6444.88,960.63 6708.66,960.63 v1(6807.09,862.2) ; v1(6606.31,2578.74) 6755.92,2429.13 v1(6795.29,2429.13) ; v1(7161.42,1070.87) 7161.42,996.06 v1(7224.41,933.07)
Net10_4: 10.4 11.2 | length 569.3
  Bottom Layer w5: 10.4@7466.49,3444.88 7704.72,3444.88 7764.7,3384.91 11.2@8010.9,3384.91
Net10_5: 10.5 27.5 44.5 60.5 70.5 U1.40 | length 6095.6
  Top Layer w5: v1(6787.4,830.71) 7224.41,830.71 7295.28,759.84 7421.26,759.84 7614.17,952.76 8057.05,952.76 v1(8059.06,952.76) 8057.05,950.75 8057.05,713.27 70.5@8055.05,711.27 ; 10.5@7211.33,3711.29 7222.45,3700.16 7222.45,3279.53 7356.31,3145.67 ; v1(7356.31,2578.74) 7356.31,3145.67 ; v1@7550.43,2429.13 7659.37,2320.2 ; 27.5@7586.33,2961.29 7582.39,2965.23 7536.75,2965.23 7356.31,3145.67 ; 44.5@7768.31,2211.26 7659.37,2320.2 ; v1(7913.39,1098.43) 7913.39,1604.34 7911.43,1606.3 ; 60.5@8148.79,1461.27 8056.47,1461.26 7911.43,1606.3 ; 7659.37,2320.2 7659.37,1858.36 7911.43,1606.3
  Bottom Layer w5: U1.40@6421.26,724.41 6421.26,885.83 6460.63,925.2 6692.91,925.2 v1(6787.4,830.71) ; v1(7356.31,2578.74) 7505.92,2429.13 v1(7545.29,2429.13) ; v1(7913.39,1098.43) v1(8059.06,952.76)
Net11_4: 11.4 12.2 | length 569.3
  Bottom Layer w5: 11.4@8214.53,3444.88 8452.76,3444.88 8512.73,3384.91 12.2@8758.95,3384.91
Net11_5: 11.5 28.5 45.5 61.5 71.5 U1.41 | length 7525.2
  Top Layer w5: v1(7543.31,334.65) 7645.67,232.28 8570.87,232.28 8771.65,433.07 v1@8771.65,932.14 ; 11.5@7961.33,3711.29 7972.45,3700.16 7972.45,3279.53 8106.31,3145.67 ; v1(8106.31,2578.74) 8106.31,3145.67 ; v1@8300.43,2429.13 8409.37,2320.2 ; 28.5@8336.33,2961.29 8332.39,2965.23 8286.75,2965.23 8106.31,3145.67 ; 45.5@8518.31,2211.26 8409.37,2320.2 ; v1(8665.35,1092.51) 8665.35,1598.43 ; v1(8771.65,937.01) v1@8771.65,932.14 ; 61.5@8898.79,1461.27 8806.47,1461.26 8409.37,1858.36 8409.37,2320.2 ; 71.5@8992.53,711.27 v1@8771.65,932.14
  Bottom Layer w5: U1.41@6452.76,724.41 6452.76,872.49 6470.03,889.76 6673.23,889.76 6763.78,799.21 7078.74,799.21 v1(7543.31,334.65) ; v1(8106.31,2578.74) 8255.92,2429.13 v1(8295.29,2429.13) ; v1(8665.35,1092.51) 8771.65,986.21 v1(8771.65,937.01)
Net12_4: 12.4 13.2 | length 569.3
  Bottom Layer w5: 12.4@8966.49,3444.88 9204.72,3444.88 9264.7,3384.91 13.2@9510.9,3384.91
Net12_5: 12.5 29.5 46.5 62.5 72.5 U1.1 | length 8667.7
  Top Layer w5: v1(7566.93,244.09) 7570.87,244.09 7602.36,212.6 9681.1,212.6 9818.9,350.39 9818.9,822.42 ; 12.5@8711.33,3711.29 8722.45,3700.16 8722.45,3279.53 8856.31,3145.67 ; v1(8856.31,2578.74) 8856.31,3145.67 ; v1@9050.43,2429.13 46.5@9268.31,2211.26 ; 29.5@9086.33,2961.29 9082.39,2965.23 9036.75,2965.23 8856.31,3145.67 ; 46.5@9273.79,2211.27 9287.4,2197.65 9287.4,1751.97 9578.1,1461.27 ; v1(9578.74,1125.98) 9578.74,1460.63 9578.1,1461.27 ; v1(9818.9,1051.18) 9818.9,822.42 ; 72.5@9930.05,711.27 9818.9,822.42 ; 62.5@10305.05,1461.27 9578.1,1461.27
  Bottom Layer w5: U1.1@6614.17,657.48 6637.68,657.48 6646.28,666.08 6646.28,669.9 6744.09,767.72 7047.24,767.72 7566.93,248.03 v1(7566.93,244.09) ; v1(8856.31,2578.74) 9005.92,2429.13 v1(9045.29,2429.13) ; v1(9578.74,1125.98) 9669.29,1125.98 9744.09,1051.18 v1(9818.9,1051.18)
Net13_4: 13.4 14.2 | length 1016.5
  Bottom Layer w5: 13.4@9708.66,3440.94 9791.34,3523.62 10366.14,3523.62 10503.94,3385.83 14.2@10633.86,3385.83
Net13_5: 13.5 30.5 47.5 U1.8 | length 9579.6
  Top Layer w5: v1(6846.46,370.08) 7023.62,192.91 10393.7,192.91 10527.56,326.77 10527.56,818.9 10870.08,1161.42 v1(11153.54,1161.42) ; 13.5@9461.33,3711.29 9472.45,3700.16 9472.45,3279.53 9598.43,3153.56 ; v1(9598.43,2586.61) 9598.43,3153.56 ; 30.5@9836.33,2961.29 9832.39,2965.23 9786.75,2965.23 9598.43,3153.56 ; v1(9917.32,2437.01) 10143.07,2211.27 47.5@10492.53,2211.27 10505.67,2224.41 10980.31,2224.41 11240.16,1964.57 11240.16,1358.27 11153.54,1271.65 v1(11152.56,1271.65)
  Bottom Layer w5: U1.8@6614.17,437.01 6744.09,437.01 6811.02,370.08 v1(6846.46,370.08) ; v1(9598.43,2586.61) 9748.03,2437.01 v1(9917.32,2437.01) ; v1(11152.56,1271.65) 11153.54,1270.67 v1(11153.54,1161.42)
Net14_4: 14.4 15.2 | length 1011.2
  Bottom Layer w5: 14.4@10838.67,3443.96 10858.36,3443.96 10938.02,3523.62 11456.69,3523.62 11594.49,3385.83 15.2@11759.84,3385.83
Net14_5: 14.5 31.5 73.5 U1.9 | length 8530.4
  Top Layer w5: v1(6822.83,338.58) 6822.83,334.65 6984.25,173.23 10606.3,173.23 10669.29,236.22 10669.29,629.92 10751.97,712.6 10753.57,712.6 10754.9,711.27 73.5@10867.53,711.27 10867.53,729.73 11291.34,1153.54 v1(11291.34,1157.48) ; 14.5@10586.33,3711.29 10598.43,3699.19 10598.43,3136.63 31.5@10773.79,2961.27 10796.79,2961.27 10815.84,2980.32 11165.35,2980.32 11291.34,2854.33 v1(11291.34,2602.36) ; v1(11291.34,1429.13) v1(11291.34,2429.13)
  Bottom Layer w5: U1.9@6614.17,405.51 6720.47,405.51 6787.4,338.58 v1(6822.83,338.58) ; v1(11291.34,1157.48) v1(11291.34,1429.13) ; v1(11291.34,2429.13) v1(11291.34,2602.36)
Net15_4: 15.4 16.2 | length 569.3
  Bottom Layer w5: 15.4@11966.49,3444.88 12204.72,3444.88 12264.7,3384.91 16.2@12510.9,3384.91
Net15_5: 15.5 32.5 48.5 63.5 74.5 U1.10 | length 9275.2
  Top Layer w5: v1(6795.28,311.02) 6952.76,153.54 11193.21,153.54 11456.69,417.03 11456.69,965.92 ; v1(11456.69,1153.54) 11456.69,965.92 ; v1(11456.69,1291.34) 11626.64,1461.29 63.5@11711.33,1461.29 ; v1(11492.13,2429.13) 11492.8,2429.13 11710.65,2211.29 48.5@11711.33,2211.29 ; v1@11492.13,2574.8 11492.13,2822.83 11630.58,2961.29 32.5@11715.26,2961.29 ; v1(11492.13,2582.68) 11492.13,2760.67 ; 32.5@11692.74,2961.29 32.5@11711.33,2961.29 11724.41,2974.37 11724.41,3698.2 15.5@11711.33,3711.29 ; 74.5@11711.33,711.29 11456.69,965.92 ; 63.5@11720.47,1457.27 48.5@11720.47,2181.1
  Bottom Layer w5: U1.10@6614.17,374.02 6696.85,374.02 6759.84,311.02 v1(6795.28,311.02) ; v1(11456.69,1153.54) v1(11456.69,1291.34) ; v1(11492.13,2429.13) v1(11492.13,2582.68)
Net16_4: 16.4 17.2 | length 569.3
  Bottom Layer w5: 16.4@12714.53,3444.88 12952.76,3444.88 13012.73,3384.91 17.2@13258.95,3384.91
Net16_5: 16.5 33.5 49.5 64.5 75.5 U1.11 | length 10074.8
  Top Layer w5: v1(6767.72,283.46) 6917.32,133.86 12110.24,133.86 12224.41,248.03 v1(12224.41,937.01) 12224.41,935.04 12448.16,711.29 12453.92,711.29 75.5@12461.33,711.29 ; v1(12224.41,1082.68) 12224.41,1314.96 12370.74,1461.29 64.5@12461.33,1461.29 ; v1@12238.84,2433.1 49.5@12460.62,2211.31 ; 12240.16,2758.76 v1(12240.16,2574.8) 12240.16,2822.83 12378.61,2961.29 33.5@12463.29,2961.29 ; 16.5@12461.3,3711.31 12474.38,3698.23 33.5@12474.38,2974.4 ; 64.5@12470.44,1457.3 49.5@12470.44,2181.13
  Bottom Layer w5: U1.11@6614.17,342.52 6673.23,342.52 6732.28,283.46 v1(6767.72,283.46) ; v1(12224.41,937.01) v1(12224.41,1082.68) ; v1(12238.16,2433.1) 12240.16,2435.09 v1(12240.16,2574.8)
Net17_4: 17.4 *.4 | length 511
  Bottom Layer w5: 17.4@13463.67,3443.96 13573.88,3443.96 13574.8,3444.88 13610.24,3444.88 13840.27,3674.91 *.4@13840.27,3713.65
Net17_5: 17.5 34.5 50.5 65.5 76.5 U1.12 | length 10686.3
  Top Layer w5: v1(6744.09,251.97) 6881.89,114.17 12814.96,114.17 12974.41,273.62 v1(12974.41,937.01) 12974.41,935.04 13198.16,711.29 76.5@13211.33,711.29 ; v1(12976.38,1078.74) 12976.38,1326.77 13110.9,1461.29 65.5@13211.33,1461.29 ; v1(12988.19,2574.8) 12988.19,2822.83 13126.64,2961.29 34.5@13211.33,2961.28 ; v1@12988.86,2433.07 50.5@13210.65,2211.29 ; 17.5@13211.33,3711.29 13224.41,3698.2 34.5@13224.41,2974.37 ; 65.5@13220.47,1457.27 50.5@13220.47,2181.1
  Bottom Layer w5: U1.12@6547.24,275.59 6551.18,271.65 6688.98,271.65 6708.66,251.97 v1(6744.09,251.97) ; v1(12974.41,937.01) 12976.38,938.98 v1(12976.38,1078.74) ; v1(12988.19,2433.07) v1(12988.19,2574.8)
Net18_4: 18.4 19.2 | length 754.5
  Bottom Layer w5: 18.4@904.39,2692.91 1232.28,2692.91 1291.34,2633.86 1632.9,2633.86 19.2@1633.95,2634.91